# EAGLE board Benjamino (EAGLE 6.1)
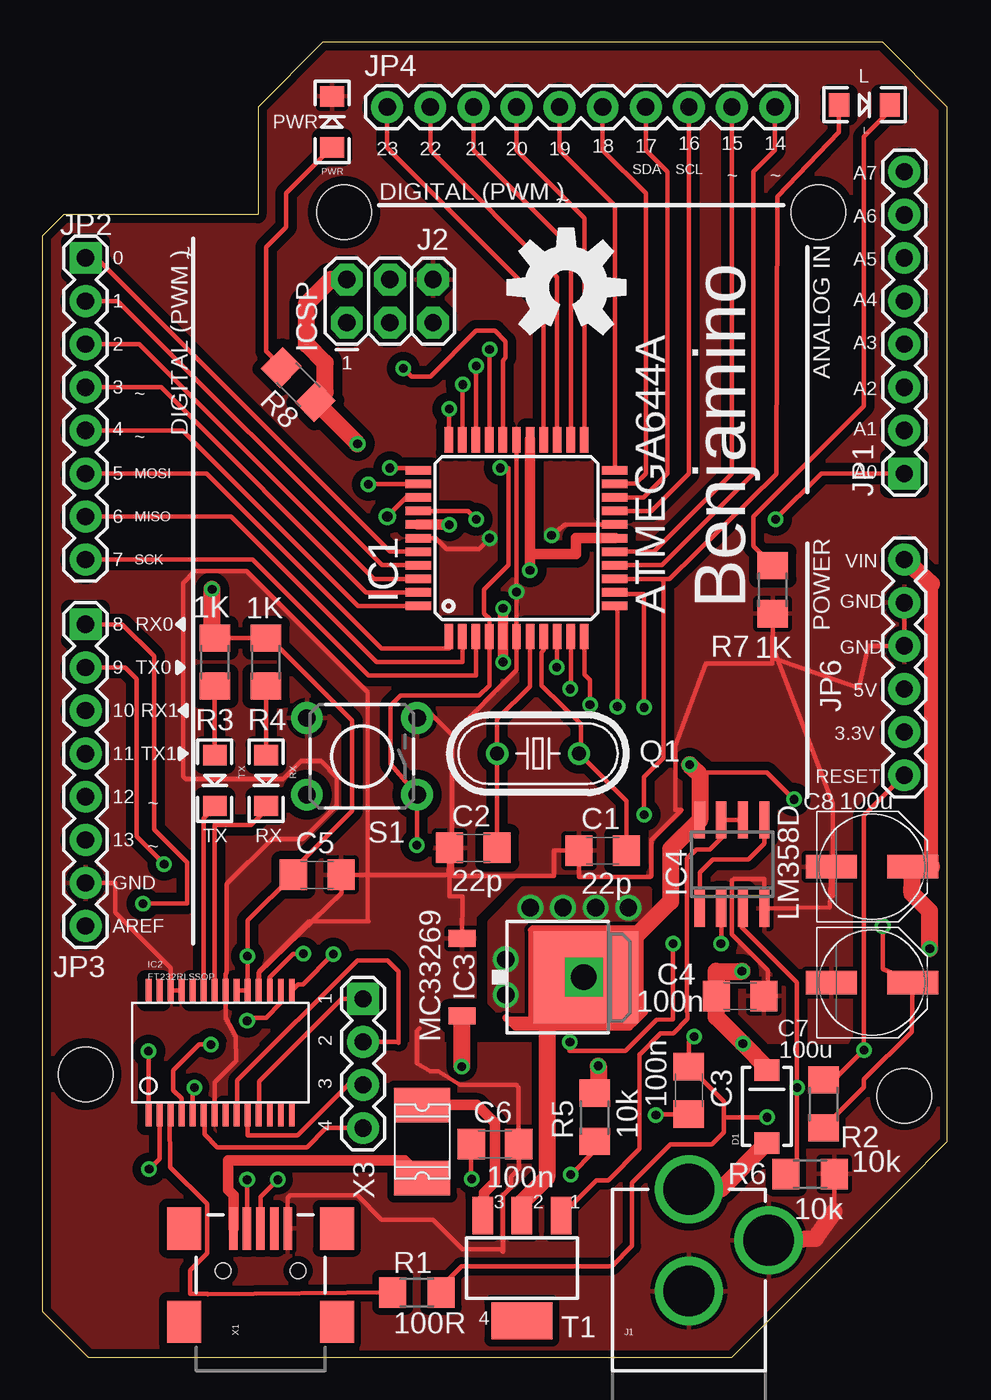
[diagram p0: board, top side]
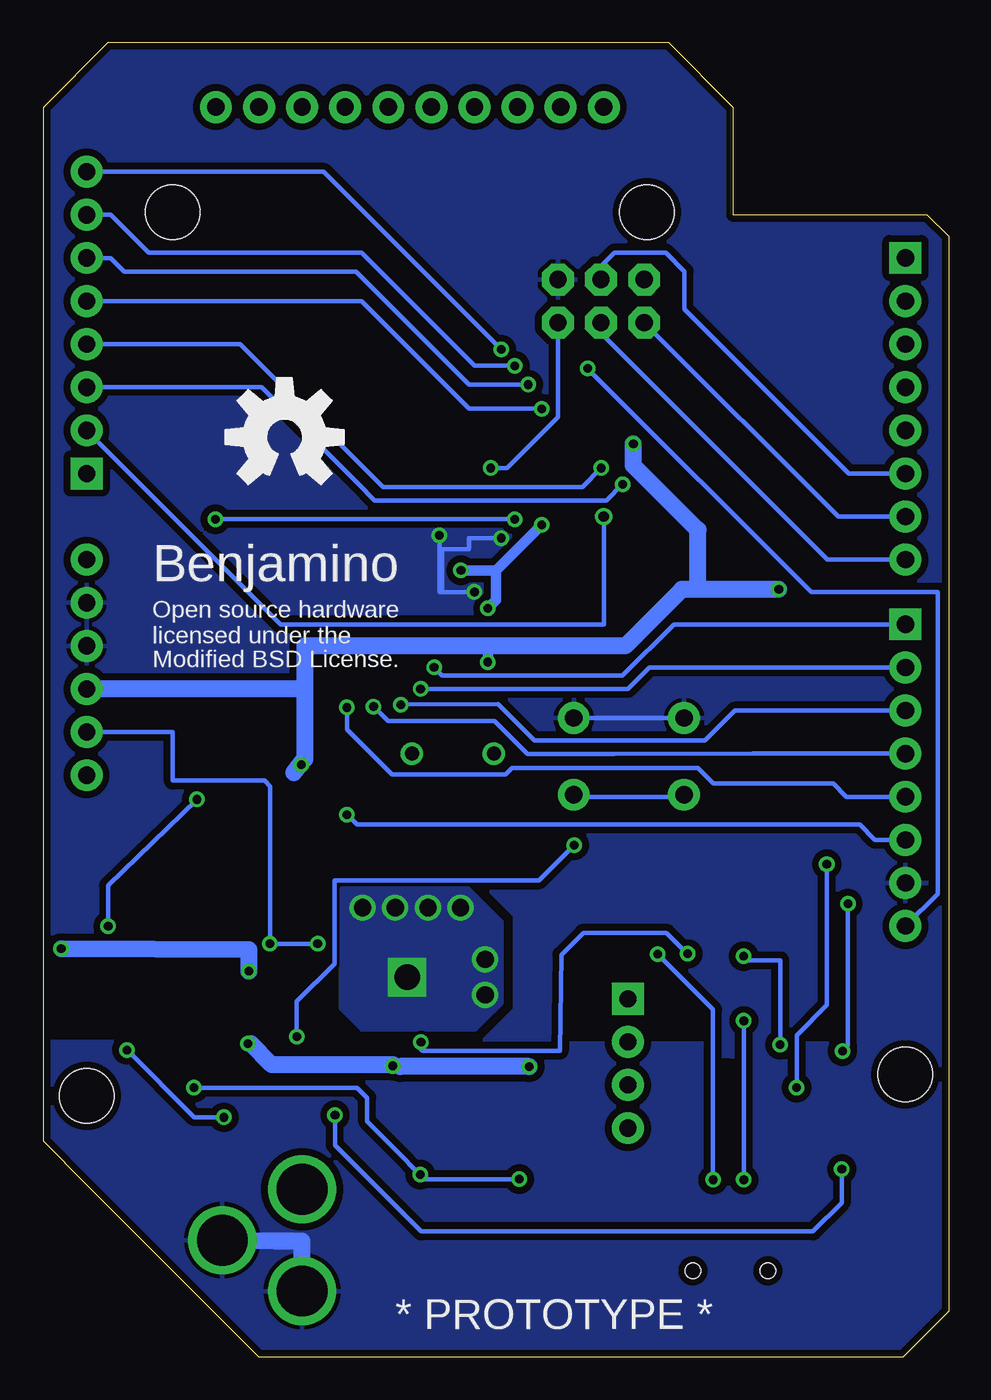
[diagram p1: board, bottom side, seen from below]

Size 53.34 x 77.47 mm. Coordinates in mm from the lower left corner, seen from the top.
Outline: 0,66.04 0,2.7 2.7,0 40.64,0 50.8,10.16 53.32,12.7 53.34,72.07 53.34,72.07 53.34,73.66 49.53,77.47 16.51,77.47 12.7,73.66 12.7,67.31 1.27,67.31 0,66.04
Copper layers (1*16): Top 0.035mm / dielectric 1.5mm / Bottom 0.035mm
Design rules: minimum track width 10mil, minimum drill 20mil, track to track 8mil, track to pad 8mil, pad to pad 8mil, via to via 8mil, smd to smd 8mil, copper to edge 10mil, drill to drill 8mil, minimum pad ring 10mil, minimum via ring 8mil, stop-mask expansion 4mil, vias tented up to drill 0mil, thermal gap 10mil
Holes 3.2 mm at 2.54,16.67 50.8,15.4 17.78,67.47 45.72,67.47

## Footprints (pad centres in the part's own frame; a part is rotated, then mirrored left to right if it is on the bottom)
C1206 = smd 1.6 x 1.8: 1 -1.4,0; 2 1.4,0
PANASONIC_D = smd 3 x 1.4: + 2.4,0; - -2.4,0
SMA-DIODE = smd 1.27 x 1.47: A -2.15,0; C 2.15,0
1812L = smd 2.03 x 3.3: P$1 -2.16,0; P$2 2.16,0
TQFP44 = smd 1.5 x 0.5: 1 -5.8,4; 2 -5.8,3.2; 3 -5.8,2.4; 4 -5.8,1.6; 5 -5.8,0.8; 6 -5.8,0; 7 -5.8,-0.8; 8 -5.8,-1.6; 9 -5.8,-2.4; 10 -5.8,-3.2; 11 -5.8,-4; 23 5.8,-4; 24 5.8,-3.2; 25 5.8,-2.4; 26 5.8,-1.6; 27 5.8,-0.8; 28 5.8,0; 29 5.8,0.8; 30 5.8,1.6; 31 5.8,2.4; 32 5.8,3.2; 33 5.8,4 | smd 0.5 x 1.5: 12 -4,-5.8; 13 -3.2,-5.8; 14 -2.4,-5.8; 15 -1.6,-5.8; 16 -0.8,-5.8; 17 0,-5.8; 18 0.8,-5.8; 19 1.6,-5.8; 20 2.4,-5.8; 21 3.2,-5.8; 22 4,-5.8; 34 4,5.8; 35 3.2,5.8; 36 2.4,5.8; 37 1.6,5.8; 38 0.8,5.8; 39 0,5.8; 40 -0.8,5.8; 41 -1.6,5.8; 42 -2.4,5.8; 43 -3.2,5.8; 44 -4,5.8
SSOP28DB = smd 0.348 x 1.397: 1 -4.225,-3.656; 2 -3.575,-3.656; 3 -2.925,-3.656; 4 -2.275,-3.656; 5 -1.625,-3.656; 6 -0.975,-3.656; 7 -0.325,-3.656; 8 0.325,-3.656; 9 0.975,-3.656; 10 1.625,-3.656; 11 2.275,-3.656; 12 2.925,-3.656; 13 3.575,-3.656; 14 4.225,-3.656; 15 4.225,3.656; 16 3.575,3.656; 17 2.925,3.656; 18 2.275,3.656; 19 1.625,3.656; 20 0.975,3.656; 21 0.325,3.656; 22 -0.325,3.656; 23 -0.975,3.656; 24 -1.625,3.656; 25 -2.275,3.656; 26 -2.925,3.656; 27 -3.575,3.656; 28 -4.225,3.656
DPACK = smd 1 x 1.6: 1 -2.28,-4.8; 3 2.28,-4.8 | smd 5.4 x 6.2: 2 0,2.5
SO08 = smd 0.6 x 2.2: 1 -1.905,-2.6; 2 -0.635,-2.6; 3 0.635,-2.6; 4 1.905,-2.6; 5 1.905,2.6; 6 0.635,2.6; 7 -0.635,2.6; 8 -1.905,2.6
POWER_JACK_PTH = drill 2.997: GND 0,7.7; GNDBREAK 4.7,10.7; PWR 0,13.7
2X3 = drill 1.016 pad 1.88 octagon: 1 0,0; 2 0,2.54; 3 2.54,0; 4 2.54,2.54; 5 5.08,0; 6 5.08,2.54
1X08 = drill 1.016 pad 1.88 square: 1 0,0 | drill 1.016 pad 1.88: 2 2.54,0; 3 5.08,0; 4 7.62,0; 5 10.16,0; 6 12.7,0; 7 15.24,0; 8 17.78,0
1X10 = drill 1.016 pad 1.88: 1 0,0; 2 2.54,0; 3 5.08,0; 4 7.62,0; 5 10.16,0; 6 12.7,0; 7 15.24,0; 8 17.78,0; 9 20.32,0; 10 22.86,0
1X06 = drill 1.016 pad 1.88: 1 0,0; 2 2.54,0; 3 5.08,0; 4 7.62,0; 5 10.16,0; 6 12.7,0
LED-1206 = smd 1.2 x 1.4: A -1.5,0; C 1.5,0
HC49U-V = drill 0.813: 1 -2.413,0; 2 2.413,0
R1206 = smd 1.6 x 1.803: 1 -1.422,0; 2 1.422,0
TACTILE-PTH = drill 1.016 pad 1.88: 1 -3.251,2.261; 2 3.251,2.261; 3 -3.251,-2.261; 4 3.251,-2.261
SOT223 = smd 1.219 x 2.235: 1 -2.311,-3.099; 2 0,-3.099; 3 2.311,-3.099 | smd 3.6 x 2.2: 4 0,3.099
USB-MINIB = smd 2.5 x 0.5: D+ 2.5,0; D- 2.5,0.8; GND 2.5,-1.6; ID 2.5,-0.8; VBUS 2.5,1.6 | smd 2.5 x 2: GND@1 -3,-4.5; GND@2 -3,4.5; GND@3 2.5,4.5; GND@4 2.5,-4.5 | hole 0.9: 0,2.2; 0,-2.2
1X04 = drill 1.016 pad 1.88 square: 1 0,0 | drill 1.016 pad 1.88: 2 2.54,0; 3 5.08,0; 4 7.62,0

## Placement (x,y rotation side)
C1  22p  [C1206]  33.02,29.84 0 top
C2  22p  [C1206]  25.4,30 0 top
C3  100n  [C1206]  38.1,15.72 270 top
C4  100n  [C1206]  41.12,21.27 0 top
C5  100n  [C1206]  16.19,28.42 0 top
C6  100n  [C1206]  26.67,12.54 0 top
C7  100u  [PANASONIC_D]  48.89,22.07 0 top
C8  100u  [PANASONIC_D]  48.9,28.89 0 top
D1  [SMA-DIODE]  42.7,14.76 90 top
F1  0.5A  [1812L]  22.38,12.7 90 top
IC1  ATMEGA644A  [TQFP44]  27.94,48.26 90 top
IC2  FT232RLSSOP  [SSOP28DB]  10.48,17.94 0 top
IC3  MC33269  [DPACK]  29.53,22.38 270 top
IC4  LM358D  [SO08]  40.64,29.05 0 top
J1  POWER_JACKPTH  [POWER_JACK_PTH]  38.1,-3.81 0 top
J2  ICSP  [2X3]  17.94,60.96 0 top
JP1  [1X08]  50.8,52.07 90 top
JP2  [1X08]  2.54,64.77 270 top
JP3  [1X08]  2.54,43.18 270 top
JP4  [1X10]  20.32,73.66 0 top
JP6  [1X06]  50.8,34.29 90 top
L  [LED-1206]  48.44,73.79 0 top
PWR  [LED-1206]  17.07,72.79 90 top
Q1  [HC49U-V]  29.21,35.56 180 top
R1  100R  [R1206]  22.07,3.81 0 top
R2  10k  [R1206]  46.04,14.92 90 top
R3  1K  [R1206]  10.16,40.96 90 top
R4  1K  [R1206]  13.18,40.96 90 top
R5  10k  [R1206]  32.54,14.13 90 top
R6  10k  [R1206]  45.24,10.8 180 top
R7  1K  [R1206]  43.05,45.22 90 top
R8  1K  [R1206]  15.08,57.31 135 top
RX  [LED-1206]  13.18,33.97 270 top
S1  [TACTILE-PTH]  18.84,35.4 180 top
T1  [SOT223]  28.26,5.24 180 top
TX  [LED-1206]  10.16,33.97 270 top
U$1  [OSHW-LOGO-L]  39.13,54.21 0 bottom
U$2  [OSHW-LOGO-L]  30.88,63.02 0 top
X1  USBSMD  [USB-MINIB]  12.86,5.08 90 top
X3  [1X04]  18.89,21.11 270 top

## Library data of the parts
C1-C8 R2 R5 R6 = rcl
D1 IC2 J1 J2 JP1-JP4 JP6 L PWR RX S1 TX X1 X3 = SparkFun
F1 = ptc-littlefuse
IC1 = atmel; MPN: ATMEGA644PV-10AU; OC_FARNELL: 1455123; OC_NEWARK: 58M3748
IC3 IC4 = linear
Q1 = crystal; OC_FARNELL: 1666969; OC_NEWARK: unknown
R1 R3 R4 R7 R8 = resistor
T1 = zetex
U$1 U$2 = SparkFun-Aesthetics

## Nets
3V3: IC2.17 IC4.2 JP6.2
AREF: IC1.29 JP3.8
GND: C1.1 C2.1 C4.2 C5.2 C6.2 C7.- C8.- IC1.6 IC1.18 IC1.28 IC1.39 IC2.7 IC2.18 IC2.21 IC2.25 IC2.26 IC3.1 IC4.4 J1.GND J1.GNDBREAK J2.6 JP3.7 JP6.4 JP6.5 PWR.C R6.1 R7.1 S1.3 S1.4 X1.GND
MISO: IC1.2 J2.1 JP2.7
MOSI: IC1.1 J2.4 JP2.6
N$1: IC1.37 JP1.1
N$2: IC1.36 JP1.2
N$3: IC1.35 JP1.3
N$4: IC1.34 JP1.4
N$5: IC1.33 JP1.5
N$6: IC1.32 JP1.6
N$7: C1.2 IC1.8 Q1.1
N$8: C2.2 IC1.7 Q1.2
N$9: IC1.31 JP1.7
N$10: IC1.30 JP1.8
N$11: IC2.15 X1.D+
N$12: IC2.16 X1.D-
N$13: IC1.26 JP4.1
N$14: IC1.25 JP4.2
N$15: IC1.24 JP4.3
N$16: IC1.23 JP4.4
N$18: D1.A J1.PWR
N$19: IC1.11 JP3.3
N$20: IC1.12 JP3.4
N$21: IC1.13 JP3.5
N$22: IC1.14 JP3.6 L.A
N$23: IC1.22 JP4.5
N$24: IC1.21 JP4.6
N$25: IC1.20 JP4.7
N$26: IC1.19 JP4.8
N$27: IC1.16 JP4.9
N$28: IC1.15 JP4.10
N$29: IC1.40 JP2.1
N$30: IC1.41 JP2.2
N$31: IC1.42 JP2.3
N$32: IC1.43 JP2.4
N$33: IC2.11 X3.1
N$34: IC2.9 X3.2
N$35: IC2.10 X3.3
N$36: IC2.6 X3.4
N$37: IC2.3 R1.1
N$38: C3.2 IC2.2
N$39: IC2.22 RX.C
N$40: IC2.23 TX.C
N$41: R3.1 TX.A
N$42: R4.1 RX.A
N$43: F1.P$1 X1.VBUS
N$45: C6.1 IC4.3 R5.1 R6.2
N$46: IC4.1 IC4.5
N$47: IC4.6 IC4.7 T1.1
N$51: L.C R7.2
N$52: PWR.A R8.2
RESET: C3.1 IC1.4 J2.5 JP6.1 R1.2 R2.2 S1.1 S1.2
RXD: IC1.9 IC2.1 JP3.1
SCK: IC1.3 J2.3 JP2.8
SS: IC1.44 JP2.5
TXD: IC1.10 IC2.5 JP3.2
USBVCC: F1.P$2 T1.3
VCC: C5.1 C7.+ IC1.5 IC1.17 IC1.27 IC1.38 IC2.4 IC2.19 IC2.20 IC3.2 IC4.8 J2.2 JP6.3 R2.1 R3.2 R4.2 R8.1 T1.2
VIN: C4.1 C8.+ D1.C IC3.3 JP6.6 R5.2

## Tracks (layer width: path | path; a pad name or v marks a point on that pad's centre or on a via)
3V3  (via drill 0.51)
  Top 0.254: IC4.2 40,24.37 v39.99,24.35 | v37.18,24.35 37.13,24.35 37.16,24.38 37.16,20.55 37.15,19.91 36.2,19.87 34.37,18.03 31.08,18.03 v31.09,18.55 | IC2.17 13.4,22.38 14.78,23.76 v15.38,23.76
  Bottom 0.254: JP6.2 45.74,36.83 45.72,33.97 40.32,33.97 39.99,33.64 v39.99,24.35 v37.18,24.35 | v31.09,18.55 31.09,18.09 30.99,18.03 22.91,18.05 22.82,23.71 21.53,25 16.62,25 v15.38,23.76
AREF  (via drill 0.51)
  Top 0.254: IC1.29 27.14,58.73 27.3,58.9 27.3,59.85 26.67,60.48 25.56,60.48 22.86,57.79 21.75,57.79 v21.27,58.26
  Bottom 0.254: v21.27,58.26 | v21.27,58.26 8.1,45.09 0.63,45.09 0.63,27.3 JP3.8
GND  (via drill 0.51)
  Top 0.254: JP6.5 JP6.4 48.69,41.91 48.11,39.43 43.05,41.18 R7.1 | 46.67,8.57 R6.1 | 24.13,36.67 27.94,40.48 IC1.6 v27.94,45.09 IC1.28 | 24.13,30.48 24.13,36.67 | C2.1 24.13,30.48 | 24.13,36.67 22.7,38.1 S1.3 | IC1.18 30.8,49.06 v30,48.42 | C2.1 23.94,28.42 C5.2 17.62,28.29 17.62,27.36 12.75,22.65 IC2.18 12.76,21.61 12.76,22.73 15.72,25.69 19.21,25.69 19.18,25.72 19.18,39.18 12.03,46.32 8.98,46.32 8.29,45.62 8.29,34.23 8.45,34.07 14.19,34.07 15.24,35.12 16.41,35.12 17.34,34.2 17.34,32.51 15.37,30.54 13.53,30.54 10.86,27.88 10.86,22.64 10.8,22.58 IC2.21 10.8,20 11.4,18.89 11.43,17.46 10.15,16.18 IC2.7 | C2.1 24,27.14 24.76,27.14 24.77,27.15 IC3.1 | 24.13,30.48 24.13,28.39 24.17,28.35 30.16,28.35 30.16,29.84 C1.1 31.62,28.3 35.84,28.3 35.9,28.35 35.9,30.46 37.67,32.24 37.31,32.24 37.31,36.04 39.1,40.88 43.02,40.88 43.02,41.27 R7.1 | IC2.25 IC2.26 7.55,22.93 4.29,26.19 4.29,27.94 JP3.7 | C4.2 42.74,21.5 42.74,22.79 40.64,24.9 40.64,28.08 40.75,28.19 42.53,28.19 42.55,28.17 IC4.4 46.41,26.51 C8.- 46.57,27.17 46.57,32.61 43.05,41.86 R7.1 | PWR.C 17.14,74.29 17.22,74.37 | 24.61,16.03 27.94,16.03 28.07,15.9 C6.2 28.1,12.51 28.1,11.11 27.62,10.64 27.62,10 27.15,9.52 27.15,6.19 26.99,6.35 24.77,6.35 23.02,8.1 20,8.1 18.57,9.52 14.6,9.52 14.46,9.38 X1.GND | 24.61,16.03 | 24.61,16.03 23.34,16.83 22.86,16.83 22.07,17.3 22.07,19.21 22.23,19.37 | IC1.39 23.18,48.26 23.81,47.62 25.72,47.62 v26.35,48.26
  Top 1.016: 46.67,8.57 45.56,6.98 J1.GNDBREAK
  Bottom 0.254: v30,48.42 30,45.09 v27.94,45.09 29.84,45.09 29.84,47.62 28.26,47.62 28.26,48.26 v26.35,48.26 | S1.3 S1.4
  Bottom 1.016: J1.GND 38.1,6.83 39.69,6.83 J1.GNDBREAK
  pour Bottom (isolate 0.406): 16.56,77.3 49.49,77.3 53.21,73.58 53.21,18.78 35.27,18.62 35.24,18.65 35.16,18.73 36.59,20.16 36.59,28.1 36.27,28.42 27.94,28.42 25.56,26.04 25.56,20.48 27.46,18.57 0.24,16.99 0.18,28.64 0.1,65.97 1.34,67.21 12.84,67.21 12.84,73.58
  pour Top (isolate 0.508): 16.56,77.3 49.49,77.3 53.21,73.58 53.21,28.55 53.18,18.57 35,18.57 36.67,20.24 36.67,27.86 35.99,28.55 28.07,28.55 25.48,25.96 25.48,20.56 25.56,0.16 2.7,0.16 0.16,2.7 0.16,2.86 0.18,28.32 0.1,65.97 1.34,67.21 12.84,67.21 12.84,73.58
  pour Top (isolate 0.406): 53.18,18.41 0.16,18.41 0.16,2.78 2.78,0.16 40.56,0.16 53.18,12.78 53.18,18.26
  pour Bottom (isolate 0.406): 53.18,18.57 34.92,18.57 34.85,18.49 0.16,18.49 0.16,2.78 2.78,0.16 40.56,0.16 53.18,12.78 53.18,18.49
MISO
  Top 0.254: IC1.2 24.77,42.44 24.77,40.96 19.68,40.96 11.11,49.53 JP2.7
  Bottom 0.254: JP2.7 6.51,49.53 J2.1
MOSI
  Top 0.254: IC1.1 23.97,42.46 23.97,41.75 20,41.75 9.68,52.07 JP2.6
  Bottom 0.254: JP2.6 5.87,52.07 15.56,61.75 15.56,63.98 16.67,65.09 19.68,65.09 20.48,64.29 J2.4
N$1  (via drill 0.51)
  Top 0.254: JP1.1 45.91,52.07 v43.21,49.37 | IC1.37 25.07,49.86 v25.56,49.37
  Bottom 0.254: v25.56,49.37 v43.21,49.37
N$2  (via drill 0.61)
  Top 0.254: v20.32,49.53 21.59,50.8 IC1.36
  Bottom 0.254: v20.32,49.53 20.32,43.18 39.37,43.18 JP1.2
N$3  (via drill 0.51)
  Top 0.254: v19.21,51.44 22.11,51.44 IC1.35
  Bottom 0.254: JP1.3 40.48,57.15 34.77,51.44 33.81,50.48 20.16,50.48 v19.21,51.44
N$4  (via drill 0.51)
  Top 0.254: v20.48,52.39 22.01,52.39 IC1.34
  Bottom 0.254: JP1.4 41.75,59.69 34.45,52.39 33.34,51.28 21.59,51.28 v20.48,52.39
N$5  (via drill 0.51)
  Top 0.254: v23.97,55.88 23.97,54.09 IC1.33
  Bottom 0.254: JP1.5 34.61,62.23 28.26,55.88 v23.97,55.88
N$6  (via drill 0.51)
  Top 0.254: v24.77,57.31 24.77,54.09 IC1.32
  Bottom 0.254: JP1.6 49.37,64.77 48.58,63.98 34.92,63.98 28.26,57.31 v24.77,57.31
N$7
  Top 0.254: IC1.8 29.57,41.68 29.41,41.52 29.41,39.58 29.47,39.52 29.49,39.52 31.75,37.31 31.75,35.69 Q1.1 34.42,32.76 C1.2
N$8
  Top 0.254: IC1.7 28.73,39.53 26.8,37.59 Q1.2 C2.2
N$9  (via drill 0.51)
  Top 0.254: v25.56,58.42 25.56,54.08 IC1.31
  Bottom 0.254: JP1.7 49.37,67.31 47.15,65.09 34.61,65.09 27.94,58.42 v25.56,58.42
N$10  (via drill 0.51)
  Top 0.254: v26.35,59.37 26.35,54.07 IC1.30
  Bottom 0.254: JP1.8 36.83,69.85 v26.35,59.37
N$11  (via drill 0.51)
  Top 0.254: X1.D+ 12.86,9.43 v13.88,10.45 | v17.14,23.75 15.37,21.97 15.08,21.97 IC2.15
  Bottom 0.254: v13.88,10.45 13.88,20.48 v17.14,23.75
N$12  (via drill 0.51)
  Top 0.254: X1.D- 12.07,10.52 v12.06,10.45 | IC2.16 14.05,20.88 13.18,20 12.25,20 v12.06,19.81
  Bottom 0.254: v12.06,10.45 v12.06,19.81
N$13
  Top 0.254: IC1.26 29.54,62.06 20.32,71.28 JP4.1
N$14
  Top 0.254: IC1.25 30.34,63.64 22.86,71.12 JP4.2
N$15
  Top 0.254: IC1.24 31.14,65.38 25.4,71.12 JP4.3
N$16
  Top 0.254: IC1.23 31.94,67.12 27.94,71.12 JP4.4
N$17
  Top 0.406: 34.92,19.84 35,19.84 35.48,20.32 35.24,20.32 35.24,25.24 28.89,25.24 28.81,25.16 28.81,19.84 27.46,19.84 | 27.46,19.84 27.3,20 | 27.46,19.84 27.86,19.45 34.61,19.45 34.92,19.76 34.61,19.76 34.45,19.61 28.26,19.61 28.1,19.68
N$18
  Top 1.016: J1.PWR 39.98,9.89 D1.A
N$19  (via drill 0.51)
  Top 0.254: IC1.11 31.94,40.23 32.27,39.9 v32.27,38.44
  Bottom 0.254: JP3.3 12.6,38.1 14.35,36.34 24.39,36.34 26.55,38.5 v32.27,38.44
N$20  (via drill 0.51)
  Top 0.254: v33.89,38.34 33.89,44.11 IC1.12
  Bottom 0.254: JP3.4 11.41,35.56 11.49,35.58 11.57,35.56 19.69,35.53 24.82,35.53 26.77,37.47 33.03,37.47 v33.89,38.34
N$21  (via drill 0.51)
  Top 0.254: v35.45,38.28 35.45,44.97 33.83,44.97 IC1.13
  Bottom 0.254: JP3.5 6.01,33.02 6.8,33.8 13.86,33.8 14.78,34.72 25.74,34.72 26.12,34.34 32.81,34.34 33.19,34.72 35.45,36.99 v35.45,38.28
N$22  (via drill 0.51)
  Top 0.254: L.A 46.94,72.17 43.31,68.37 43.25,52.02 36.97,45.84 36.48,45.84 | 36.48,45.84 33.76,45.84 IC1.14 | v35.45,31.97 35.45,34.18 36.59,35.31 36.59,45.73 36.48,45.84
  Bottom 0.254: JP3.6 4.34,30.48 5.23,31.37 34.86,31.37 v35.45,31.97
N$23
  Top 0.254: IC1.22 33.74,67.86 30.48,71.12 JP4.5
N$24
  Top 0.254: IC1.21 34.95,51.46 35.56,52.07 35.56,68.58 33.02,71.12 JP4.6
N$25
  Top 0.254: IC1.20 35.42,50.66 36.83,52.07 36.83,69.85 35.56,71.12 JP4.7
N$26
  Top 0.254: IC1.19 35.89,49.86 38.1,52.07 JP4.8
N$27
  Top 0.254: IC1.16 36.03,47.46 40.64,52.07 JP4.9
N$28
  Top 0.254: IC1.15 36.5,46.66 41.91,52.07 41.91,69.85 43.18,71.12 JP4.10
N$29
  Top 0.254: IC1.40 20.48,47.46 3.49,64.45 3.17,64.77 JP2.1
N$30
  Top 0.254: IC1.41 20.02,46.66 4.44,62.23 JP2.2
N$31
  Top 0.254: IC1.42 19.55,45.86 5.71,59.69 JP2.3
N$32
  Top 0.254: IC1.43 19.07,45.06 6.98,57.15 JP2.4
N$33
  Top 0.254: X3.1 17.64,21.11 12.79,16.26 12.79,14.32 IC2.11
N$34
  Top 0.254: X3.2 20.94,18.57 20.99,18.53 20.99,22.74 20.34,23.38 18.56,23.38 11.49,16.31 11.49,14.32 IC2.9
N$35
  Top 0.254: X3.3 18.01,16.03 15.05,13.07 12.08,13.07 12.08,14.26 IC2.10
N$36
  Top 0.254: X3.4 16.71,13.49 15.59,12.37 10.31,12.37 9.55,13.13 9.55,14.24 IC2.6
N$37
  Top 0.254: R1.1 9.75,3.71 9.72,3.72 8.71,3.72 8.71,5.12 9.72,6.13 9.72,9.03 7.53,11.19 7.5,14.23 IC2.3
N$38  (via drill 0.51)
  Top 0.254: IC2.2 6.9,11.69 v6.29,11.08 | C3.2 36.21,14.32 v36.16,14.26
  Bottom 0.254: v6.29,11.08 6.29,9.1 7.99,7.41 31.08,7.41 36.16,12.48 v36.16,14.26
N$39
  Top 0.254: IC2.22 10.15,31.35 12.3,31.35 13.34,32.38 RX.C
N$40
  Top 0.254: IC2.23 9.5,31.73 10.16,32.38 TX.C
N$41
  Top 0.254: TX.A R3.1
N$42
  Top 0.254: RX.A R4.1
N$43
  Top 0.61: X1.VBUS 11.26,9.54 10.95,9.84 10.95,11.59 21.34,11.59 F1.P$1
N$45  (via drill 0.51)
  Top 0.254: R6.2 44.46,11.5 44.47,12.91 v44.47,15.88 44.47,22.09 | 44.47,22.09 41.28,25.27 IC4.3 41.27,25.37 41.23,25.33 44.47,22.09 | C6.1 25.27,10.51 v25.3,10.48 | R5.1 32.54,12.16 v31.14,10.75 | 44.47,22.09
  Bottom 0.254: v25.3,10.48 30.87,10.48 v31.14,10.75 32.54,12.16 32.54,12.17 34.27,13.89 34.27,15.29 34.86,15.88 v44.47,15.88
N$46
  Top 0.254: IC4.5 42.55,30.26 41.61,29.32 39.5,29.32 38.75,28.56 38.75,26.46 IC4.1
N$47
  Top 0.254: IC4.6 IC4.7 40,30.58 39.34,29.91 38.53,29.91 37.99,29.38 37.99,20.64 38.02,19.92 37.18,19.08 37.06,19.08 36.43,19.07 35.24,17.86 35.21,17.82 35.18,17.82 35.18,12.27 33.35,10.43 32.66,10.43 T1.1
N$51
  Top 0.254: L.C 49.94,73.44 48.42,71.91 48.42,56.04 41.91,49.53 41.91,47.78 R7.2
N$52
  Top 0.254: R8.2 14.08,58.39 13.18,59.29 13.18,61.67 13.18,65.41 | 13.18,65.41 | 13.18,65.41 14.37,66.6 14.37,68.59 PWR.A
RESET  (via drill 0.51)
  Top 0.254: R1.2 23.49,4.15 24.7,5.36 33.57,5.36 34.75,6.54 34.75,10.27 37.02,12.54 39.45,12.54 40.15,13.24 40.15,14.14 | JP6.1 48.42,31.91 v48.42,18.1 v48.42,18.09 47.15,16.83 46.67,16.34 R2.2 | 40.15,14.14 40.15,15.07 C3.1 38.1,18.57 v38.42,18.89 | 40.15,14.14 40.16,14.13 v42.7,14.13 | v22.07,30.16 22.07,33.12 S1.1 20.5,34.94 20.5,38.39 21.1,38.98 25.74,38.98 26.34,39.58 IC1.4 26.34,43.51 26.03,43.81 26.03,45.24 27.46,46.67 27.46,52.39 v26.99,52.39
  Bottom 0.254: S1.2 16.51,33.02 21.59,33.02 S1.1 | v42.7,14.13 44.45,14.13 v48.42,18.1 | v38.42,18.89 38.42,20.95 36.2,23.18 36.2,28.1 24.13,28.1 v22.07,30.16 | v26.99,52.39 26.03,52.39 23.02,55.4 J2.5
RXD  (via drill 0.51)
  Top 0.254: IC1.9 30.34,40.66 v30.32,40.64 | JP3.1 4.7,43.18 6.58,41.3 6.58,31.1 8.52,29.16 8.52,26.72 v5.93,26.72 | v6.25,18.02 IC2.1
  Bottom 0.254: JP3.1 16.19,43.18 19.21,40.16 29.84,40.16 v30.32,40.64 | v5.93,26.72 5.93,18.35 v6.25,18.02
SCK
  Top 0.254: IC1.3 25.56,42.44 25.56,40.16 19.21,40.16 12.38,46.99 JP2.8
  Bottom 0.254: J2.3 20.48,60.32 18.1,57.94 | 18.1,57.94 | 18.1,57.94 7.14,46.99 JP2.8
SS
  Top 0.254: IC1.44 18.6,44.26 8.25,54.61 JP2.5
TXD  (via drill 0.51)
  Top 0.254: IC1.10 31.14,39.4 v31.11,39.37 | JP3.2 4.87,40.64 5.55,39.95 5.55,30.67 v7.17,29.05 | IC2.5 8.85,15.78 v8.95,15.88
  Bottom 0.254: JP3.2 17.62,40.64 18.89,39.37 v31.11,39.37 | v7.17,29.05 7.17,20.74 8.95,18.96 v8.95,15.88
USBVCC
  Top 0.61: F1.P$2 25.62,14.86 26.67,13.81 26.67,10.32 26.03,9.68 T1.3
VCC  (via drill 0.51, 1.02, 1.5)
  Top 0.254: IC1.27 28.74,48.27 28.73,48.26 28.73,47.31 28.74,47.31 | IC1.38 v23.97,49.05 v23.96,49.06 | v27.15,44.13 IC1.5 | 10.16,42.86 R3.2 11.27,42.38 R4.2 13.23,42.33 13.43,42.33 18.24,37.52 18.24,32.18 14.79,28.74 C5.1 12.1,25.73 IC2.19 IC2.20 12.08,21.59 12.08,21.6 v12.08,23.62 | 28.26,9.12 T1.2 | 29.73,20.09 IC3.2 32.57,22.38 | IC4.8 38.73,31.63 | v38.14,34.9 38.62,34.4 38.73,34.29 | 9.22,18.42 v9.92,18.42 | 9.22,18.42 | 9.22,18.42 7.71,16.91 7.71,15.72 8.2,15.23 IC2.4 | R2.1 48.42,15.88 48.42,16.35 51.25,19.18 C7.+ 49.53,22.86 v49.53,25.4 | v44.29,32.86 42.7,34.45 38.64,34.45 | R8.1 16.67,56.88 | 16.35,62.87
  Top 0.61: 28.74,47.31 IC1.27 | 10.16,42.86 10,42.86 | v23.96,49.06 IC1.38 | IC1.17 31.43,48.26 31.43,47.31 28.73,47.31 v28.73,46.35 | v27.15,40.96 v27.15,44.13
  Top 1.016: 10,42.86 v10,45.24 | 28.26,9.12 29.73,10.59 29.73,20.09 | 32.57,22.38 37.02,26.84 37.02,29.94 IC4.8 38.73,34.29 | v38.14,34.9 38.64,34.45 | J2.2 16.99,63.5 16.35,62.87 15.56,62.07 15.56,59.69 16.67,58.58 16.67,56.88 | v18.57,53.82 R8.1
  Bottom 0.254: v28.73,46.35 26.67,46.35 v23.97,49.05 | v23.97,49.05 | 38.6,34.43 v38.14,34.9 | v12.08,23.62 11.75,23.37 9.92,23.38 v9.92,18.42 | v49.53,25.4 49.53,27.78 v44.29,32.86 | 14.6,45.24 14.76,45.4
  Bottom 0.61: 26.67,46.35 v23.97,49.05 | 26.67,46.35 v28.73,46.35 | 26.67,46.35 26.67,44.61 v27.15,44.13 | 27.15,41.91 v27.15,40.96
  Bottom 1.016: v10,45.24 14.6,45.24 15.72,45.24 19.05,41.91 27.15,41.91 37.94,41.91 37.94,39.37 | 37.94,39.37 JP6.3 | 37.94,39.37 37.94,35.24 38.6,34.43 | v18.57,53.82 18.57,52.55 14.76,48.74 14.76,45.4
  other vias: 28.76,26.48 30.68,26.48 32.61,26.48 34.54,26.48 27.31,23.43 27.31,21.34 31.91,22.38
  pour Top: 35.72,27.54 35.72,20.56 35.16,20 27.3,20 26.43,20.88 26.43,25.64 28.34,27.54
  pour Bottom: 35.72,27.54 28.34,27.54 26.43,25.64 26.43,20.88 27.94,19.37 34.53,19.37 34.85,19.68 34.85,19.68 35.72,20.56
VIN  (via drill 0.51)
  Top 0.254: 42.7,17.05 D1.C | v24.71,17.12 24.73,17.14 | 32.76,15.76 R5.2 | C4.1 39.72,20.04
  Top 0.813: 52.39,28.89 52.39,45.56
  Top 1.016: 52.39,45.56 JP6.6 | 52.39,28.89 C8.+ 51.25,27.32 52.3,26.27 v52.3,24.06 | 42.7,17.05 v41.28,18.47 39.72,20.04 | 24.73,17.14 IC3.3 | v32.76,17.16 32.76,15.76 | v41.23,22.73 39.72,22.73 C4.1 | 39.72,20.04 C4.1
  Bottom 0.254: 32.32,17.12 v32.76,17.16 32.76,17.23 | 41.12,18.47 v41.28,18.47
  Bottom 1.016: v24.71,17.12 32.32,17.12 | v52.3,24.06 41.23,24 v41.23,22.73 | 41.12,18.47 39.88,17.23 32.76,17.23

## Text on the board
tPlace: L | PWR | 16 | 15 | 14 | 23 | 22 | 21 | 20 | 19 | 18 | 17 | ~ | ~ | A7 | DIGITAL (PWM ) | ~ | A6 | ANALOG IN | 0 | ~ | A5 | 1 | A4 | 2 | A3 | 1 | 3 | ~ | A2 | 4 | DIGITAL (PWM ) | A1 | ~ | 5 | MOSI | A0 | 6 | MISO | POWER | 7 | SCK | VIN | Benjamino | GND | 8 | RX0 | GND | 9 | TX0 | 5V | 10 | RX1 | 3.3V | 11 | TX1 | RESET | 12 | ~ | 13 | TX | RX | ~ | GND | AREF | 1 | 2 | 3 | 4
bPlace: Benjamino | Open source hardware | licensed under the | Modified BSD License. | * PROTOTYPE *
tNames: SDA | SCL